# Altium PCB PCB1.pcbdoc
Units mil, origin at the board's own origin, x right, y up, seen from the top; angles counter-clockwise.
Board outline 2191.35 x 1279.37 mil, 4 copper layers (Top Layer, Inner1, Inner2, Bottom Layer), stack 38.584 mil thick; 62 components, 47 nets, 215 pads, 120 vias.
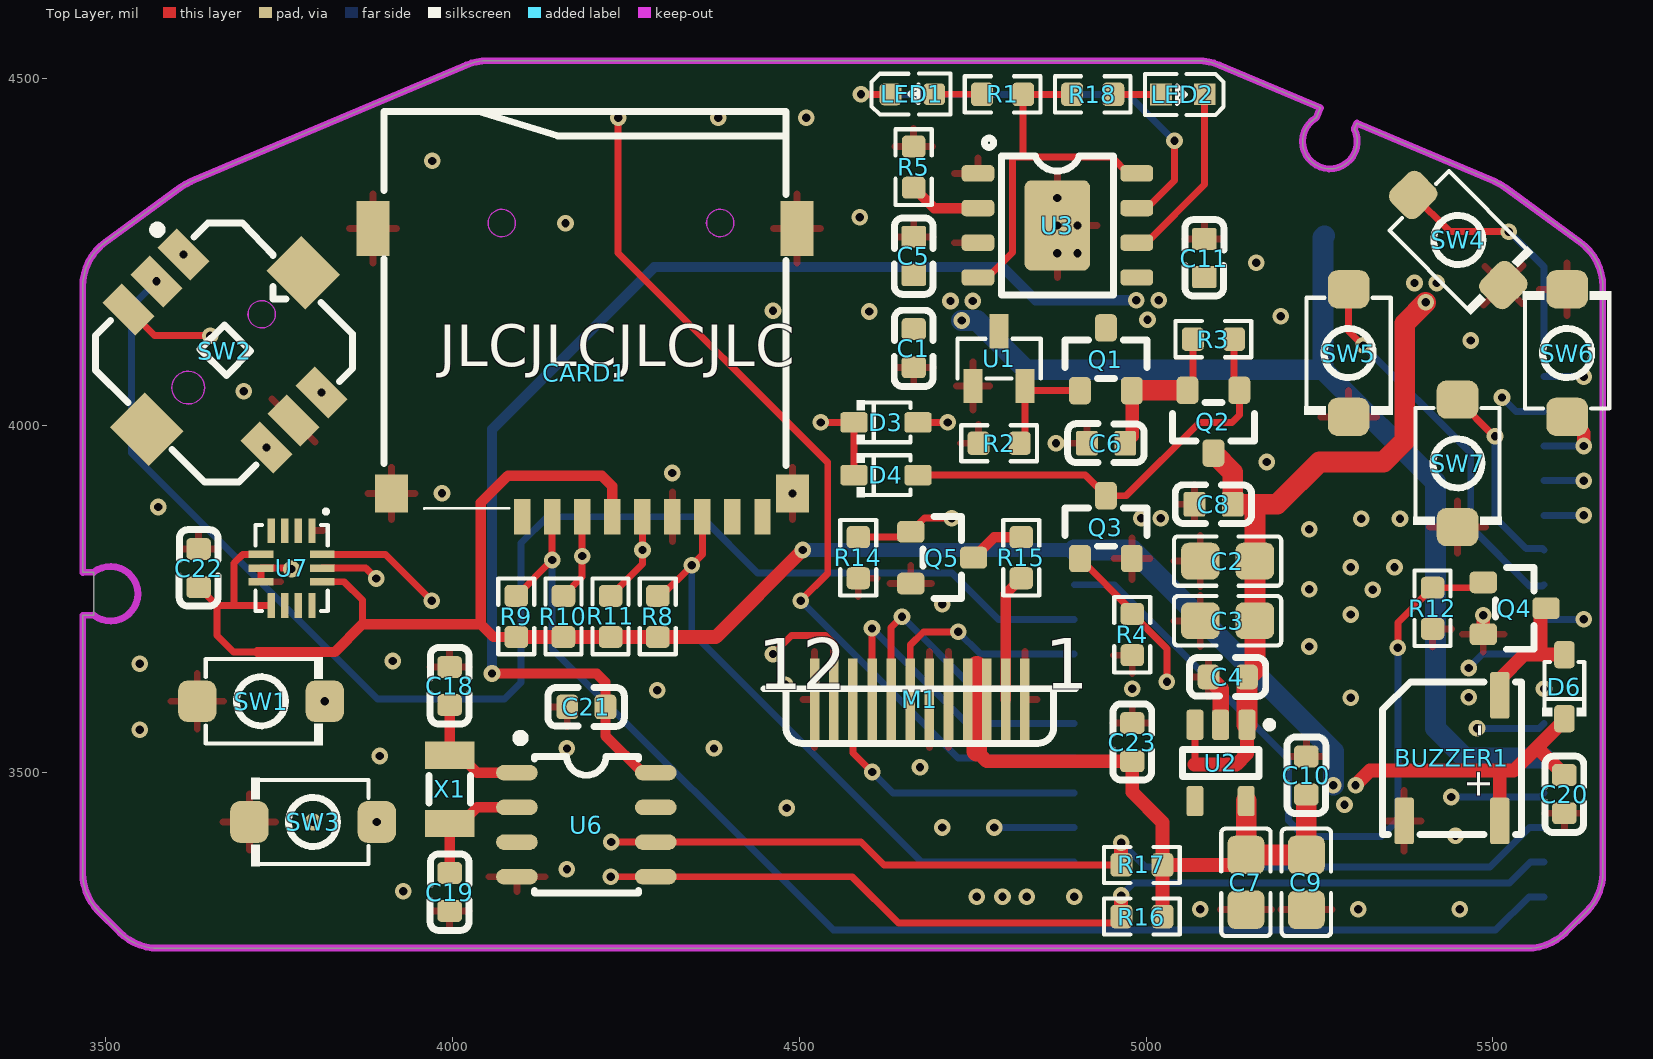
[diagram p0: Top Layer view]
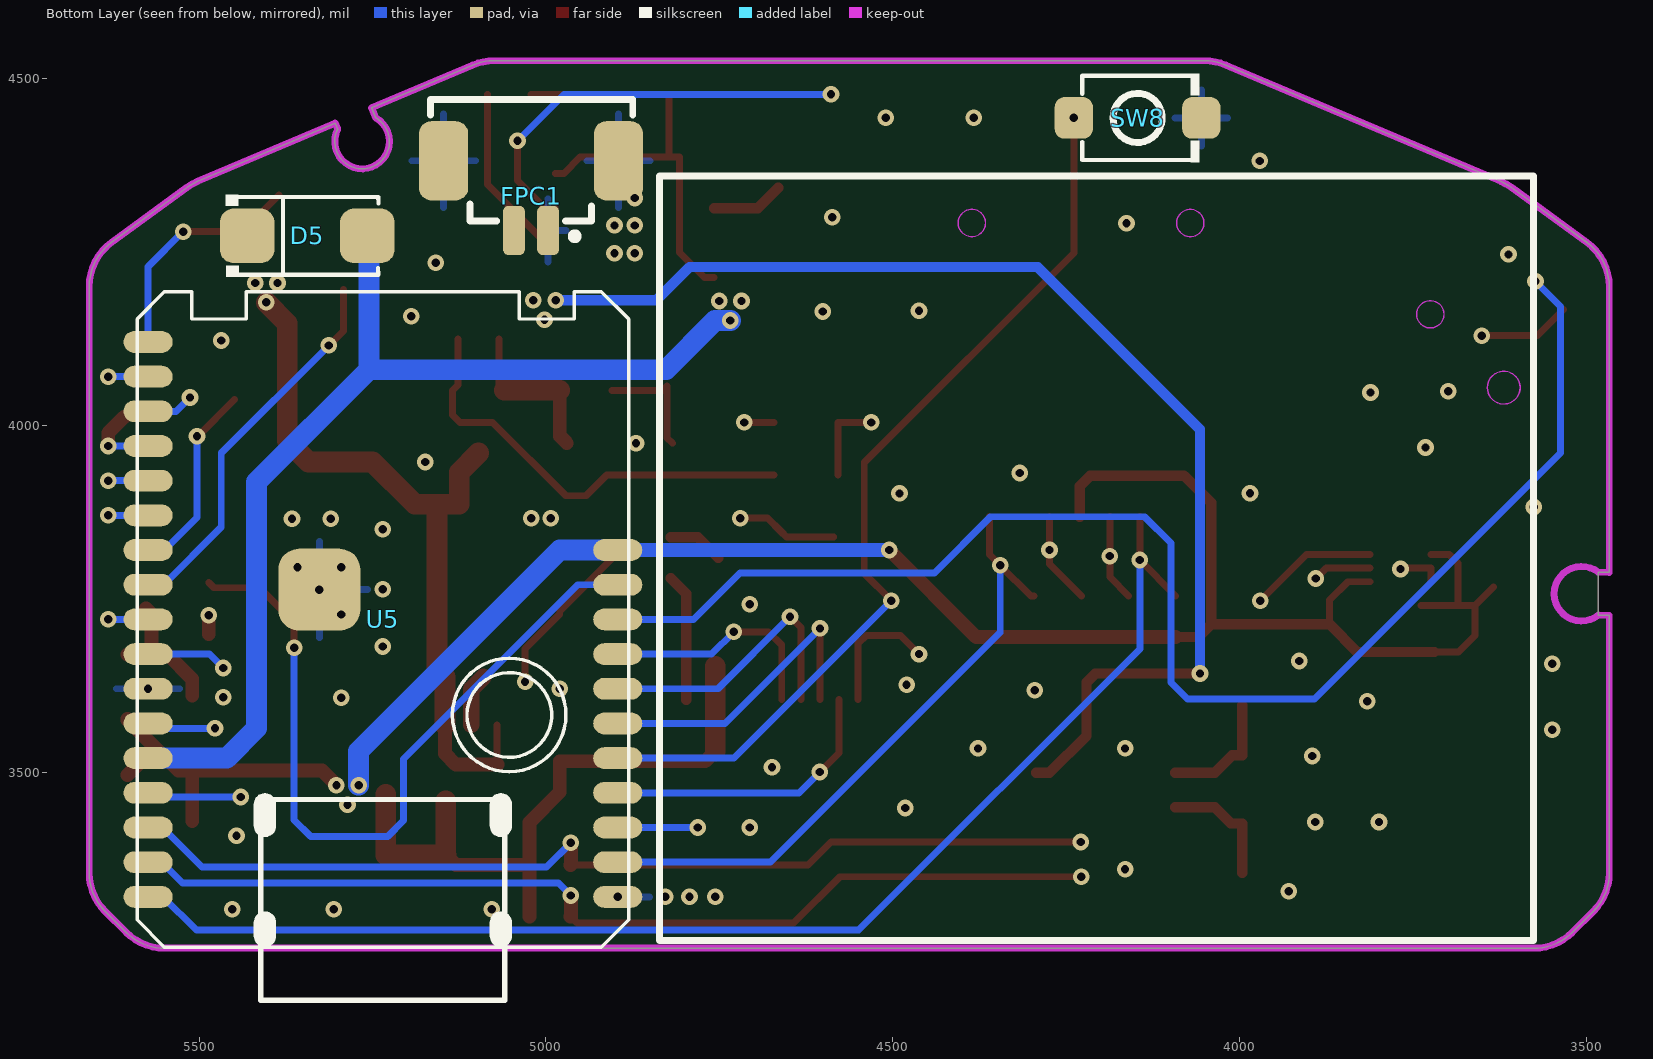
[diagram p1: Bottom Layer view, seen from below]
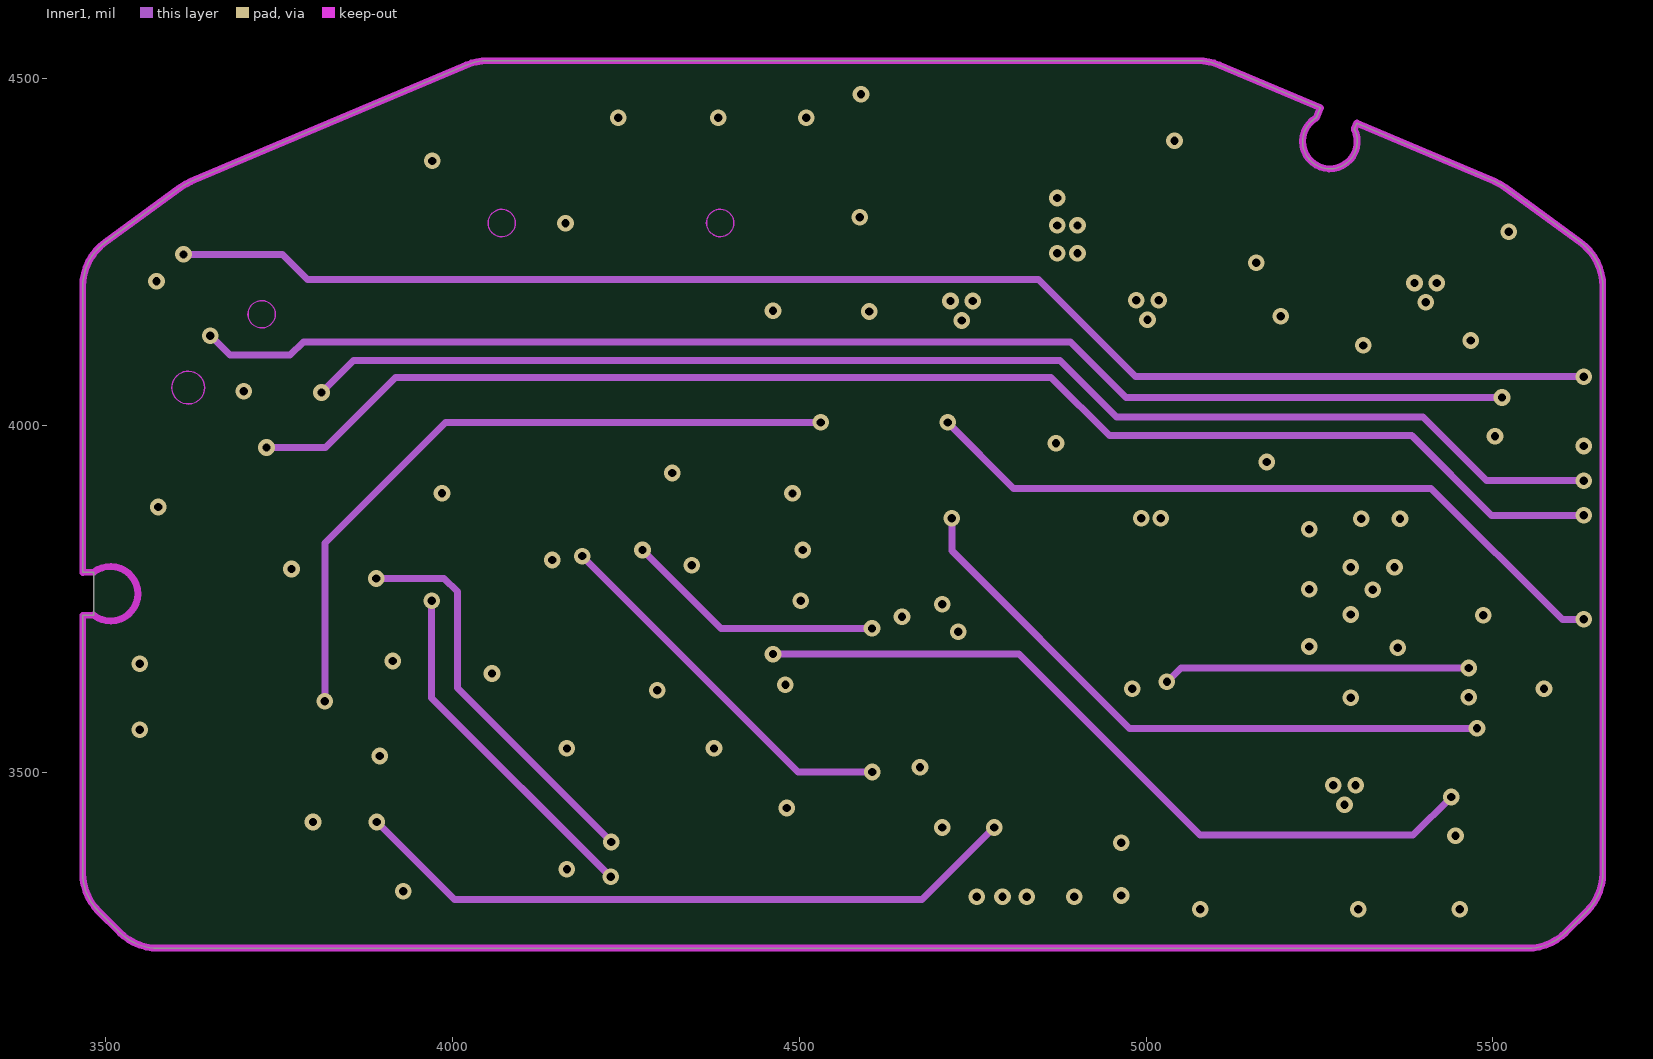
[diagram p2: Inner1]
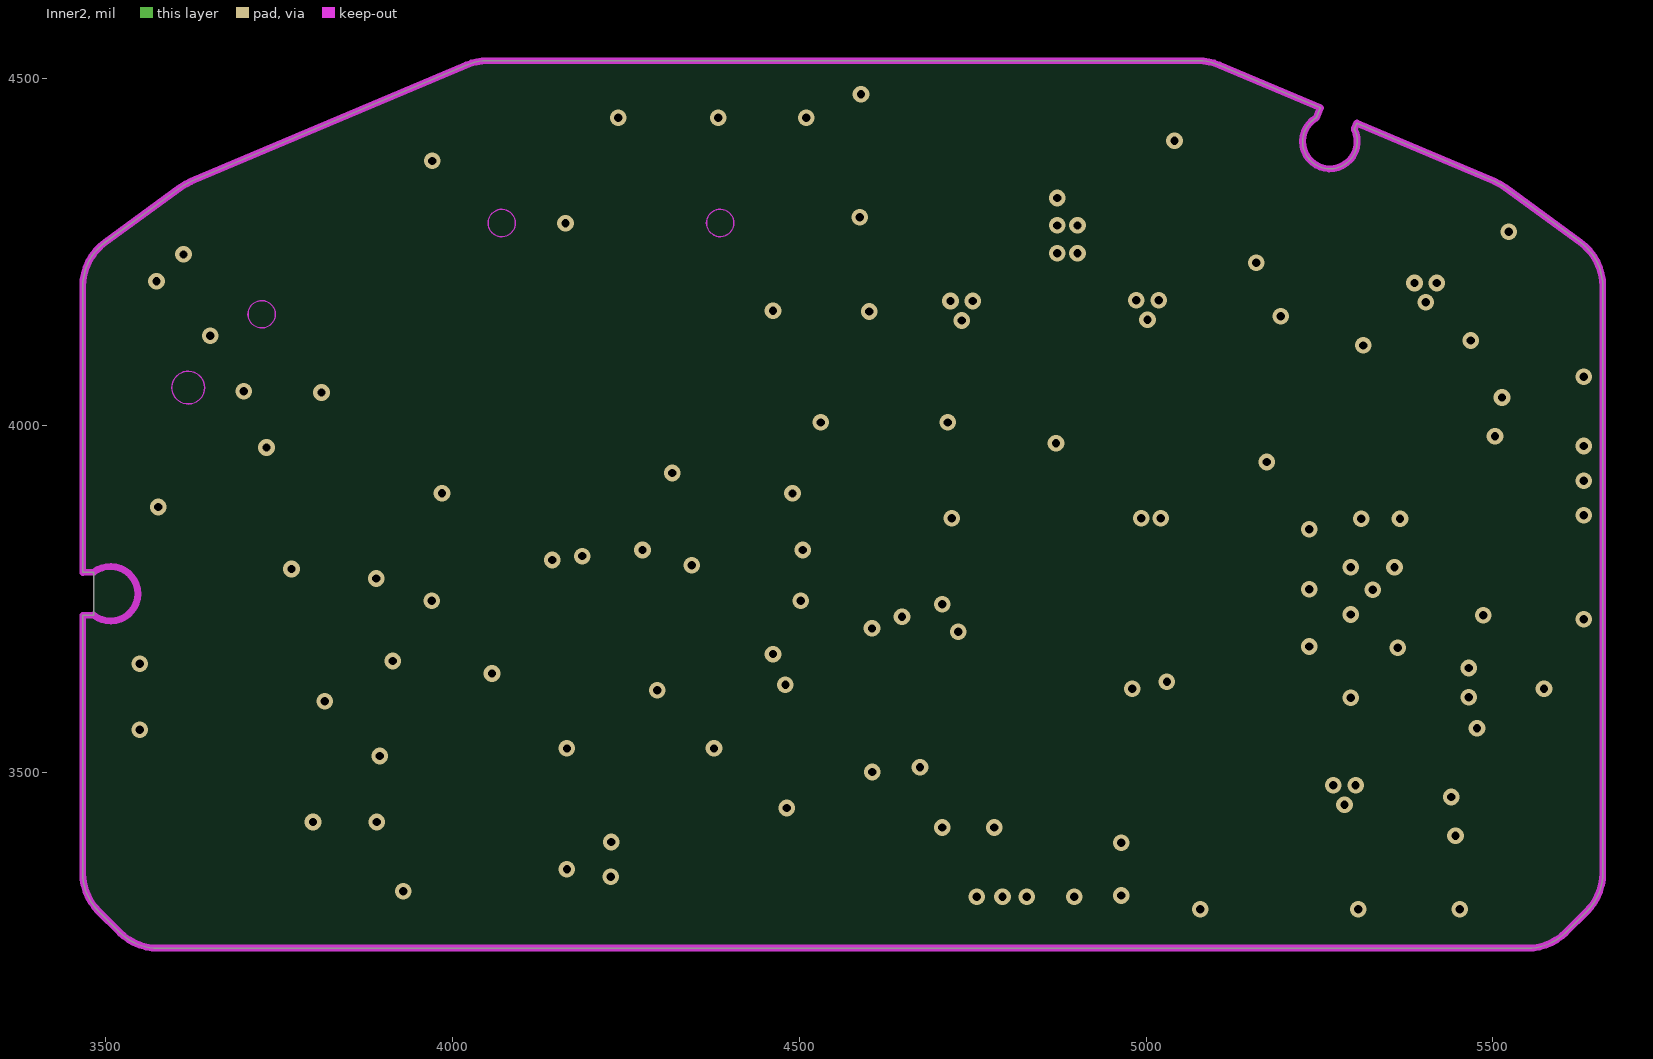
[diagram p3: Inner2]

## Layer stack, top to bottom
Top Solder Mask Layer: solder mask 0.394, Dk 0
Top Layer: signal copper 1.378
Dielectric1: surface 11.024, 7628 RC49% 8.6mil, Dk 0
Inner1: signal copper 1.378
Dielectric2: surface 11.024, 1.1mm H/HOZ 含铜, Dk 0
Inner2: signal copper 1.378
Dielectric3: surface 11.024, 7628 RC49% 8.6mil, Dk 0
Bottom Layer: signal copper 1.378
Bottom Solder Mask Layer: solder mask 0.394, Dk 0

## Board outline
3483,3788 3467,3787.83 3467,4200.07 cw(c3545.74,4200.07) 3499.36,4263.7 3607.66,4342.65 cw(c3654.04,4279.02) 3623.37,4351.54 4019.69,4519.16 cw(c4050.36,4446.63) 4050.36,4525.37 5074.98,4525.37 cw(c5074.98,4446.63) 5105.66,4519.16 5251.31,4457.55 5245,4443 ccw(c5264.96,4409.02) 5300.17,4426.72 5303.82,4435.35 5501.98,4351.54 cw(c5471.31,4279.02) 5517.69,4342.65 5625.99,4263.7 cw(c5579.61,4200.07) 5658.35,4200.07 5658.35,3354.62 cw(c5579.61,3354.62) 5635.29,3298.94 5605.41,3269.06 cw(c5549.73,3324.74) 5549.73,3246 3575.62,3246 cw(c3575.62,3324.74) 3519.94,3269.06 3490.06,3298.94 cw(c3545.74,3354.62) 3467,3354.62 3467,3725.92 3482.73,3726.12

## Design rules (kind name [scope] priority, off if disabled: settings)
BoardOutlineClearance copperThickness1oz [All] p0: genericclearance=10 ignorepadtopadclearanceinfootprint=FALSE except(0: Arc-SplitContinuation Track-SplitContinuation SMDPad-SplitContinuation THPad-SplitContinuation Via-SplitContinuation Fill-SplitContinuation Poly-SplitContinuation Region-SplitContinuation Text-SplitContinuation)
BoardOutlineClearance copperThickness2oz [All] p0: genericclearance=10 ignorepadtopadclearanceinfootprint=FALSE except(0: Arc-SplitContinuation Track-SplitContinuation SMDPad-SplitContinuation THPad-SplitContinuation Via-SplitContinuation Fill-SplitContinuation Poly-SplitContinuation Region-SplitContinuation Text-SplitContinuation)
BoardOutlineClearance Plane_innerPlane [All] p0: genericclearance=10 ignorepadtopadclearanceinfootprint=FALSE except(0: Arc-SplitContinuation Track-SplitContinuation SMDPad-SplitContinuation THPad-SplitContinuation Via-SplitContinuation Fill-SplitContinuation Poly-SplitContinuation Region-SplitContinuation Text-SplitContinuation)
BoardOutlineClearance Copper_copperRegion [All] p0: genericclearance=10 ignorepadtopadclearanceinfootprint=FALSE except(0: Arc-SplitContinuation Track-SplitContinuation SMDPad-SplitContinuation THPad-SplitContinuation Via-SplitContinuation Fill-SplitContinuation Poly-SplitContinuation Region-SplitContinuation Text-SplitContinuation)
BoardOutlineClearance Copper_copperAll [All] p0: genericclearance=10 ignorepadtopadclearanceinfootprint=FALSE except(0: Arc-SplitContinuation Track-SplitContinuation SMDPad-SplitContinuation THPad-SplitContinuation Via-SplitContinuation Fill-SplitContinuation Poly-SplitContinuation Region-SplitContinuation Text-SplitContinuation)
BoardOutlineClearance otherClearance [All] p0: genericclearance=10 ignorepadtopadclearanceinfootprint=FALSE except(0: Arc-SplitContinuation Track-SplitContinuation SMDPad-SplitContinuation THPad-SplitContinuation Via-SplitContinuation Fill-SplitContinuation Poly-SplitContinuation Region-SplitContinuation Text-SplitContinuation)
Clearance copperThickness1oz [All] p1: gap=7 ignorepadtopadclearanceinfootprint=FALSE
Clearance copperThickness2oz [All] p1: gap=7 ignorepadtopadclearanceinfootprint=FALSE
Clearance Plane_innerPlane [All] p1: gap=7 ignorepadtopadclearanceinfootprint=FALSE
Clearance Copper_copperRegion [All] p1: gap=7 ignorepadtopadclearanceinfootprint=FALSE
Clearance Copper_copperAll [All] p1: gap=7 ignorepadtopadclearanceinfootprint=FALSE
Clearance otherClearance [All] p1: gap=7 ignorepadtopadclearanceinfootprint=FALSE
DiffPairsRouting differentialPair [All] p1: maxuncoupledlength=10 minlimit=6 maxlimit=Infinity mostfreqgap=6 toplayer_minwidth=5 toplayer_prefwidth=10 toplayer_maxwidth=100 bottomlayer_minwidth=5 bottomlayer_prefwidth=10 bottomlayer_maxwidth=100 midlayer1_minwidth=5 midlayer1_prefwidth=10 midlayer1_maxwidth=100 midlayer2_minwidth=5 midlayer2_prefwidth=10 midlayer2_maxwidth=100
PasteMaskExpansion pasteMaskExpansion [All] p1: expansion=0
PlaneConnect innerPlane [All] p1: planeconnectstyle=Relief reliefexpansion=20 reliefentries=4 reliefconductorwidth=10 reliefairgap=10
PolygonConnect copperRegion [All] p1: connectstyle=Relief reliefentries=4 reliefconductorwidth=10 polygonreliefangle="90 Angle" airgapwidth=10
PolygonConnect copperAll [All] p1: connectstyle=Direct reliefentries=4 reliefconductorwidth=10 polygonreliefangle="90 Angle" airgapwidth=10
RoutingVias viaSize [All] p1: viastyle="Through Hole" holewidth=12 minholewidth=11.8 maxholewidth=248 width=12 minwidth=11.8 maxwidth=248
SolderMaskExpansion solderMaskExpansion [All] p1: useseparateexpansions=TRUE expansion=2 expansionbottom=2
Width copperThickness1oz [All] p1: maxlimit=100 minlimit=5 preferedwidth=10
Width copperThickness2oz [All] p1: maxlimit=100 minlimit=8 preferedwidth=10

## Components (designator, comment, footprint, x,y, rotation, side; value= is the part's Value field where it differs from the comment)
BUZZER1 "" BUZ-SMD_L5.0-W5.5-P4.60 5441,3520 r90 top
C1 "" C0603#1 4665.05,4111 r90 top
C2 "" C0805 5117.44,3804 r0 top
C3 "" C0805 5117.44,3718 r0 top
C4 "" C0603#1 5117.75,3637 r0 top
C5 "" C0603#2 4665.05,4244 r90 top
C6 "" C0603#2 4942.31,3974 r0 top
C7 "" C0805 5144,3341 r90 top
C8 "" C0603#2 5097.31,3886 r0 top
C9 "" C0805 5231,3341 r90 top
C10 "" C0603#1 5231,3494.97 r270 top
C11 "" C0603#2 5083.89,4241 r270 top
C18 "" C0603#1 3995.79,3624 r270 top
C19 "" C0603#1 3996,3327 r90 top
C20 "" C0603#1 5603,3468.11 r90 top
C21 "" C0603#1 4193,3593.77 r0 top
C22 "" C0603#1 3634,3794 r270 top
C23 "" C0603#1 4980,3543 r270 top
CARD1 "" TF-SMD_TF-01A 4191,4075.88 r180 top
D3 "" SOD-323_L1.8-W1.3-LS2.5-RD#1 4625,4004 r0 top
D4 "" SOD-323_L1.8-W1.3-LS2.5-RD#1 4625,3928 r0 top
D5 "" SMA_L4.3-W2.6-LS5.2-RD 5344,4273 r180 bottom
D6 "" SOD-323_L1.8-W1.3-LS2.5-RD#2 5603,3623 r90 top
FPC1 "" CONN-SMD_2P-P1.25_DEALON_1.25-2PWB 5021.4,4331 r0 bottom locked
LED1 "" LED0603-RD-YELLOW 4663,4477 r0 top
LED2 "" LED0603-RD 5053,4477 r180 top
M1 "" 1.3寸TFT240_240 4043.84,3183.09 r0 top locked
Q1 "" SOT-23_L2.9-W1.3-P1.90-LS2.4-BR 4942,4095 r270 top
Q2 "" SOT-23_L2.9-W1.3-P1.90-LS2.4-BR 5097,4005.01 r90 top
Q3 "" SOT-23-3_L2.9-W1.6-P1.90-LS2.8-BR 4942,3853 r270 top
Q4 "" SOT-23-3_L2.9-W1.6-P1.90-LS2.8-BR 5531.35,3736 r180 top
Q5 "" SOT-23-3_L2.9-W1.6-P1.90-LS2.8-BR 4706,3809 r180 top
R1 "" R0603 4793,4477 r180 top
R2 "" R0603 4788,3974 r0 top
R3 "" R0603 5097,4124 r180 top
R4 "" R0603 4980,3698 r90 top
R5 "" R0603 4664.95,4372 r270 top
R8 "" R0603 4296,3724.26 r270 top
R9 "" R0603 4092,3724.26 r270 top
R10 "" R0603 4160,3724.26 r270 top
R11 "" R0603 4228,3724.26 r270 top
R12 "" R0603 5413,3736 r270 top
R14 "" R0603 4585,3809 r270 top
R15 "" R0603 4820,3809 r270 top
R16 "" R0603 4994,3291.57 r0 top
R17 "" R0603 4994,3366 r0 top
R18 "" R0603 4923,4477 r0 top
SW1 "" SW-SMD_L3.9-W3.0-P4.45 3724,3602 r0 top
SW2 "" SW-SMD_TM-4175-B-X 3672,4107 r315 top locked
SW3 "" SW-SMD_L3.9-W3.0-P4.45 3799,3428 r180 top
SW4 "" SW-SMD_L3.9-W3.0-P4.45 5450,4267 r315 top
SW5 "" SW-SMD_L3.9-W3.0-P4.45 5292,4104 r270 top
SW6 "" SW-SMD_L3.9-W3.0-P4.45 5607,4104 r90 top
SW7 "" SW-SMD_L3.9-W3.0-P4.45 5449,3945 r270 top
SW8 "" SW-SMD_L3.9-W3.0-P4.45 4147,4443 r180 bottom
U1 "" SOT-23-3_L2.9-W1.3-P1.90-LS2.4-BR 4788,4095.98 r270 top
U2 "" SOT-25-5_L3.0-W1.8-P0.95-LS3.0-BR 5107.87,3513 r90 top
U3 "" ESOP-8_L4.9-W3.9-P1.27-LS6.0-BL-EP 4872,4288 r270 top
U5 "" STAMP-S3-PIN-SMD 5235,3720 r180 bottom locked
U6 "" SOIC-8_L5.0-W4.0-P1.27-LS6.0-BL 4193,3424 r270 top
U7 "" LGA-14_L3.0-W2.5-P0.50-BR 3768,3794 r90 top
X1 "" FC-135R_L3.2-W1.5 3996,3475 r270 top

## Footprints (in the part's own frame and the unit in brackets; to place one, negate y for a bottom-side part, rotate by r counter-clockwise, add the part's x,y. Pads: shape width x height; smd on the part's side, far side on the other; paste and mask are expansions set on the pad)
1.3寸TFT240_240 [mm]
  rect 0.35x3 smd: 1(19.85,10.7) 2(19.15,10.7) 3(18.45,10.7) 4(17.75,10.7) 5(17.05,10.7) 6(16.35,10.7) 7(15.65,10.7) 8(14.95,10.7) 9(14.25,10.7) 10(13.55,10.7) 11(12.85,10.7) 12(12.15,10.7)
  silkscreen extent 10.3,9.1 21.7,11.1
BUZ-SMD_L5.0-W5.5-P4.60 [mm]
  rrect20% 1.7x0.7 smd: 1(-2.3,-1.75) 2(2.3,-1.75) 3(-2.3,1.75)
  silkscreen extent -2.79,-2.54 2.79,2.54
C0603#1 [mm]
  rrect40% 0.8x0.9 smd: 1(-0.7,0) 2(0.7,0)
  silkscreen extent -1.41,-0.71 1.39,0.72
C0603#2 [mm]
  rrect20% 0.8x0.9 smd: 1(-0.7,0) 2(0.7,0)
  silkscreen extent -1.41,-0.71 1.39,0.72
C0805 [mm]
  rrect40% 1.41x1.35 smd: 1(-1,0) 2(1,0)
  silkscreen extent -1.96,-0.9 1.96,0.9
CONN-SMD_2P-P1.25_DEALON_1.25-2PWB [mm]
  rrect50% 0.8x1.8 smd: 1(-0.625,1.275) 2(0.625,1.275)
  rrect50% 1.8x2.9 smd: 3(-3.2,-1.275) 4(3.2,-1.275)
  silkscreen extent -3.73,-3.52 3.67,1.62
ESOP-8_L4.9-W3.9-P1.27-LS6.0-BL-EP [mm]
  rrect50% 0.6x1.2 smd: 1(-1.905,-2.908) 2(-0.635,-2.908) 3(0.635,-2.908) 4(1.905,-2.908) 5(1.905,2.908) 6(0.635,2.908) 7(-0.635,2.908) 8(-1.905,2.908)
  rrect20% 3.3x2.4 smd: 9(0,0)
  silkscreen extent -3.2,-2.67 2.55,2.05
FC-135R_L3.2-W1.5 [mm]
  rect 1x1.8 smd: 1(-1.25,0) 2(1.25,0)
  silkscreen extent -0.51,-0.76 0.51,0.76
LED0603-RD [mm]
  rect 0.8x0.8 smd: 1(-0.799,-0.003) 2(0.799,0.003)
  silkscreen extent -1.49,-0.75 1.39,0.76
LED0603-RD-YELLOW [mm]
  rrect40% 0.8x0.8 smd: 1(-0.799,-0.003) 2(0.799,0.003)
  silkscreen extent -1.49,-0.75 1.39,0.76
LGA-14_L3.0-W2.5-P0.50-BR [mm]
  rect 0.9x0.27 smd: 1(1.37,-0.75) 2(1.37,-0.25) 3(1.37,0.25) 4(1.37,0.75) 8(-1.37,0.75) 9(-1.37,0.25) 10(-1.37,-0.25) 11(-1.37,-0.75)
  rect 0.27x0.9 smd: 5(0.5,1.12) 6(0,1.12) 7(-0.5,1.12) 12(-0.5,-1.12) 13(0,-1.12) 14(0.5,-1.12)
  silkscreen extent -1.58,-1.33 2.14,1.33
R0603 [mil]
  rrect40% 31.75x34.02 smd: 1(-29.66,0) 2(29.66,0)
  silkscreen extent -55,-26 55,26
SMA_L4.3-W2.6-LS5.2-RD [mm]
  rrect50% 2x2 smd: 1(-2.2,0) 2(2.2,0)
  silkscreen extent -2.98,-1.5 2.6,1.5
SOD-323_L1.8-W1.3-LS2.5-RD#1 [mm]
  rrect30% 1x0.75 smd: 1(-1.173,0) 2(1.173,0)
  silkscreen extent -1.08,-0.8 0.9,0.8
SOD-323_L1.8-W1.3-LS2.5-RD#2 [mm]
  rrect40% 1x0.75 smd: 1(-1.173,0) 2(1.173,0)
  silkscreen extent -1.08,-0.8 0.9,0.8
SOIC-8_L5.0-W4.0-P1.27-LS6.0-BL [mil]
  oval 22.38x60 smd: 1(-75,-100) 2(-25,-100) 3(25,-100) 4(75,-100) 5(75,100) 6(25,100) 7(-25,100) 8(-75,100)
  silkscreen extent -131,-101 98,75
SOT-23-3_L2.9-W1.3-P1.90-LS2.4-BR [mm]
  rect 1.25x0.7 smd: 1(1,-0.95) 2(1,0.95) 3(-1,0)
  silkscreen extent -0.73,-1.53 0.73,1.53
SOT-23-3_L2.9-W1.6-P1.90-LS2.8-BR [mm]
  rrect40% 1x0.8 smd: 1(1.15,-0.95) 2(1.15,0.95) 3(-1.15,0)
  silkscreen extent -0.7,-1.5 0.7,1.5
SOT-23_L2.9-W1.3-P1.90-LS2.4-BR [mm]
  rrect40% 1x0.8 smd: 1(1.15,-0.95) 2(1.15,0.95) 3(-1.15,0)
  silkscreen extent -0.7,-1.5 0.7,1.5
SOT-25-5_L3.0-W1.8-P0.95-LS3.0-BR [mil]
  rrect30% 43.5x24.5 smd: 1(55,-37.5) 2(55,0.5) 3(55,37.5) 4(-55,37.5) 5(-55,-36.5)
  silkscreen extent -20,-75 60,56
STAMP-S3-PIN-SMD [mm]
  oval 1.8x0.8 smd: 1(-8.6,10.16) 2(-8.6,8.89) 3(-8.6,7.62) 4(-8.6,6.35) 5(-8.6,5.08) 6(-8.6,3.81) 7(-8.6,2.54) 8(-8.6,1.27) 9(-8.6,0) 10(-8.6,-1.27) 11(-8.6,-2.54) 12(-8.6,-3.81) 13(-8.6,-5.08) 14(-8.6,-6.35) 15(-8.6,-7.62) 16(-8.6,-8.89) 17(-8.6,-10.16) 18(8.6,-10.16) 19(8.6,-8.89) 20(8.6,-7.62) 21(8.6,-6.35) 22(8.6,-5.08) 23(8.6,-3.81) 24(8.6,-2.54) 25(8.6,-1.27) 26(8.6,0) 27(8.6,1.27) 28(8.6,2.54)
  rrect50% 3x3 smd: 31(-2.328,1.088)
  silkscreen extent -9,-13.95 9,12
SW-SMD_L3.9-W3.0-P4.45 [mil]
  rrect50% 55x60 smd: 1(-91.93,0) 2(91.93,0)
  silkscreen extent -80,-64 89,64
SW-SMD_TM-4175-B-X [mm]
  rect 1.7x1 smd: 1(-3.575,1.425) 2(-3.575,0.028) 3(-3.575,-1.425) 4(3.575,1.425) 5(3.575,-0.028) 6(3.575,-1.425)
  rect 2x1.8 smd: 7(0,4.05) 7(0,-4.05)
  Board Outline Layer circle w0.003: c0,1.9 r0.5
  Board Outline Layer circle w0.003: c0,-1.9 r0.6
  Board Outline Layer region: 0.354,2.254 0.472,2.065 0.497,1.844 0.423,1.634 0.266,1.477 0.056,1.403 -0.165,1.428 -0.354,1.546 -0.354,1.546 -0.472,1.735 -0.497,1.956 -0.423,2.166 -0.266,2.323 -0.056,2.397 0.165,2.372 0.354,2.254
  Board Outline Layer region: 0.354,2.254 0.472,2.065 0.497,1.844 0.423,1.634 0.266,1.477 0.056,1.403 -0.165,1.428 -0.354,1.546 -0.354,1.546 -0.472,1.735 -0.497,1.956 -0.423,2.166 -0.266,2.323 -0.056,2.397 0.165,2.372 0.354,2.254
  Board Outline Layer region: 0.424,-1.476 0.566,-1.702 0.596,-1.967 0.508,-2.219 0.319,-2.408 0.067,-2.496 -0.198,-2.466 -0.424,-2.324 -0.424,-2.324 -0.566,-2.098 -0.596,-1.833 -0.508,-1.581 -0.319,-1.392 -0.067,-1.304 0.198,-1.334 0.424,-1.476
  Board Outline Layer region: 0.424,-1.476 0.566,-1.702 0.596,-1.967 0.508,-2.219 0.319,-2.408 0.067,-2.496 -0.198,-2.466 -0.424,-2.324 -0.424,-2.324 -0.566,-2.098 -0.596,-1.833 -0.508,-1.581 -0.319,-1.392 -0.067,-1.304 0.198,-1.334 0.424,-1.476
  silkscreen extent -5.04,-3.93 3.76,3.76
TF-SMD_TF-01A [mm]
  rect 0.6x1.3 smd: 1(2.301,5.276) 2(1.201,5.276) 3(0.101,5.276) 4(-0.999,5.276) 5(-2.099,5.276) 6(-3.199,5.276) 7(-4.299,5.276) 8(-5.399,5.276) 9(-6.499,5.276)
  rect 1.2x1.4 smd: 10(-7.599,4.426) 13(7.081,4.426)
  rect 1.2x2 smd: 11(-7.76,-5.276) 12(7.76,-5.276)
  Board Outline Layer circle w0.003: c-4.95,-5.478 r0.5
  Board Outline Layer circle w0.003: c3.05,-5.475 r0.5
  Board Outline Layer region: -5.45,-5.478 -5.4,-5.261 -5.262,-5.087 -5.061,-4.991 -4.839,-4.991 -4.638,-5.087 -4.5,-5.261 -4.45,-5.478 -4.45,-5.478 -4.5,-5.695 -4.638,-5.869 -4.839,-5.965 -5.061,-5.965 -5.262,-5.869 -5.4,-5.695 -5.45,-5.478
  Board Outline Layer region: -5.45,-5.478 -5.4,-5.261 -5.262,-5.087 -5.061,-4.991 -4.839,-4.991 -4.638,-5.087 -4.5,-5.261 -4.45,-5.478 -4.45,-5.478 -4.5,-5.695 -4.638,-5.869 -4.839,-5.965 -5.061,-5.965 -5.262,-5.869 -5.4,-5.695 -5.45,-5.478
  Board Outline Layer region: 2.55,-5.475 2.6,-5.258 2.738,-5.085 2.939,-4.988 3.161,-4.988 3.362,-5.085 3.5,-5.258 3.55,-5.475 3.55,-5.475 3.5,-5.692 3.362,-5.866 3.161,-5.963 2.939,-5.963 2.738,-5.866 2.6,-5.692 2.55,-5.475
  Board Outline Layer region: 2.55,-5.475 2.6,-5.258 2.738,-5.085 2.939,-4.988 3.161,-4.988 3.362,-5.085 3.5,-5.258 3.55,-5.475 3.55,-5.475 3.5,-5.692 3.362,-5.866 3.161,-5.963 2.939,-5.963 2.738,-5.866 2.6,-5.692 2.55,-5.475
  silkscreen extent -7.37,-9.56 7.37,4.97

## Via types
v1: diameter 24, hole 12, Top Layer to Bottom Layer, 108 vias
v2: diameter 24.02, hole 12.01, Top Layer to Bottom Layer, 12 vias

## Nets (pads, with @x,y where several pads share a name; then routed paths per layer and width w, separated by ;. In a path a pad name is that pad's centre, name@x,y a point inside that pad or via, vN(x,y) a via of type N, cw(c..) or ccw(c..) an arc to the next point about the centre after c; other vN are vias at no path point)
$1N2328: R5.2 U3.2 | length 104.7
  Top Layer w15: R5.2 4694.29,4313 U3.2
$1N2338: Q1.1 R2.2 U1.2 | length 167.9
  Top Layer w10: R2.2 4825.4,3981.74 U1.2 4832.29,4049.72 Q1.1
$1N2343: C6.2 Q1.2 Q2.2 R3.2 | length 237.8
  Top Layer w10: Q1.2 Q1.2@4979.96,4050.28 ; Q2.2 5067.34,4058.03 R3.2
  Top Layer w20: C6.2 4979.96,3984.1 Q1.2@4979.96,4050.28
  Top Layer w30: Q1.2@4979.96,4050.28 Q2.2
$1N2351: D4.2 Q2.1 Q3.3 R3.1 | length 636.5
  Top Layer w10: D4.2 4912.28,3928 Q3.3 4971.28,3898.28 5077,4004 5124,4004 5134.4,4014.4 Q2.1 5126.66,4058.03 R3.1
$1N2352: D3.1 D4.1 SW1.2 | length 1138.9
  Top Layer w10: v1(4531,4004) D3.1 D4.1
  Inner1 w10: v1(3815.93,3602) 3815.93,3829.93 3990,4004 v1(4531,4004)
$1N2361: LED1.2 R1.2 | length 68.9
  Top Layer w10: LED1.2 4763.2,4477.14 R1.2
$1N5094: BUZZER1.2 D6.2 Q4.3 | length 201.3
  Top Layer w20: BUZZER1.2 5509.9,3633.89 5545.16,3669.16 5568.51,3669.16 ; Q4.3 5568.51,3727.88 5568.51,3669.16 ; D6.2 5568.51,3669.16
$1N6154: C19.2 U6.2 X1.2 | length 177.8
  Top Layer w15: C19.2 X1.2 4012.78,3425.78 4036,3449 U6.2
$1N6155: C18.2 U6.1 X1.1 | length 179.8
  Top Layer w15: C18.2 3995.99,3596.23 X1.1 4010.78,3524.22 4036,3499 U6.1
$1N15050: LED1.1 U3.7 | length 650.4
  Top Layer w10: v1(4589,4477) 4631.39,4477 LED1.1 ; U3.7 5001,4313 5041,4353 v1(5041,4410)
  Bottom Layer w10: v1(4589,4477) 4974,4477 v1(5041,4410)
$1N15134: LED2.2 R18.2 | length 68.9
  Top Layer w10: R18.2 5021.39,4477 LED2.2
$1N15243: LED2.1 U3.6 | length 263
  Top Layer w10: U3.6 5000.64,4263 5084.48,4346.83 LED2.1
$1N15373: Q5.3 R15.1 | length 81
  Top Layer w15: Q5.3 4780.94,3838.66 R15.1
BUS_I2C_CLK: R17.1 U5.15 U6.6 U7.13 | length 2090.8
  Top Layer w10: U7.13 3875.01,3793.99 v1(3890,3779) ; v1(4229,3399) U6.6 4589,3399 4622,3366 R17.1
  Top Layer w20: v1(4964,3398) 4964,3366.34 R17.1
  Inner1 w10: v1(3890,3779) 3988,3779 4007,3760 4007,3621 v1(4229,3399)
  Bottom Layer w10: v1(4964,3398) 4999,3363 5496,3363 5553,3420 U5.15
BUS_I2C_SDA: R16.1 U5.16 U6.5 U7.14 | length 2118.5
  Top Layer w10: U7.14 3903.32,3813.68 v1(3970,3747) ; v1(4228,3349) U6.5 4576,3349 4643,3282 4954.77,3282 R16.1
  Top Layer w20: v1(4964,3322) 4964,3291.91 R16.1
  Inner1 w10: v1(3970,3747) 3970,3607 v1(4228,3349)
  Bottom Layer w10: v1(4964,3322) 4982,3340 5524,3340 5554,3370 U5.16
BUS_SPI_CLK: CARD1.5 M1.9 R11.1 U5.23 | length 962.1
  Top Layer w10: R11.1 4274,3799.92 v1(4274,3820) 4274,3867.82 CARD1.5 ; M1.9 v1(4604.87,3707)
  Inner1 w10: v1(4274,3820) 4387,3707 v1(4604.87,3707)
  Bottom Layer w10: v1(4604.87,3707) 4741.87,3570 U5.23
BUS_SPI_CS_LCD: M1.8 U5.24 | length 417.6
  Top Layer w10: M1.8 4632.43,3708.43 v1(4648,3724)
  Bottom Layer w10: v1(4648,3724) 4752,3620 U5.24
BUS_SPI_CS_SD: CARD1.2 R9.1 U5.17 | length 1881.7
  Top Layer w10: R9.1 v1(4143.73,3805.65) CARD1.2
  Bottom Layer w10: v1(4143.73,3805.65) 4143.73,3677.27 4549,3272 5504,3272 5552,3320 U5.17
BUS_SPI_MISO: CARD1.7 R8.1 U5.19 | length 929.3
  Top Layer w10: R8.1 4300.92,3753.92 v1(4345,3798) 4360.27,3813.27 CARD1.7
  Bottom Layer w10: v1(4345,3798) 4345,3701 4676,3370 U5.19
BUS_SPI_MOSI: CARD1.3 M1.10 R10.1 U5.21 | length 1092
  Top Layer w10: R10.1 4187.04,3780.96 v1(4187.04,3811.29) CARD1.3 ; M1.10 4577.31,3527.69 v1(4605,3500)
  Inner1 w10: v1(4187.04,3811.29) 4498.33,3500 v1(4605,3500)
  Bottom Layer w10: v1(4605,3500) 4635,3470 U5.21
ESP_EN: SW8.1 U5.22 | length 1325.7
  Top Layer w10: v1(4238.93,4443) 4238.93,4248.07 4541,3946 4541,3786 v1(4502,3747)
  Bottom Layer w10: v1(4502,3747) 4729,3520 U5.22
GND: BUZZER1.3 C1.1 C2.1 C3.1 C4.1 C5.2 C6.1 C7.1 C8.1 C9.1 C10.1 C11.1 C18.1 C19.1 C20.1 C21.1 C22.1 C23.1 CARD1.6 CARD1.10 CARD1.11 CARD1.12 CARD1.13 FPC1.1 FPC1.3 FPC1.4 M1.1 M1.5 M1.6 M1.12 Q3.2 Q4.2 Q5.2 R2.1 R4.1 R5.1 R12.2 R14.2 SW1.1 SW2.5 SW3.2 SW4.2 SW5.2 SW6.2 SW7.2 SW8.2 U1.1 U2.2 U3.1 U3.3 U3.9 U5.11 U5.18 U5.31 U6.4 U7.1 U7.6 U7.7 | length 167.9
  Top Layer w10: U7.7 U7.6 3766.67,3793.99 v1(3768,3792.67)
  Top Layer w20: v1(5486,3726) 5486.07,3725.93 Q4.2
  Top Layer w24: C4.1 5107.37,3619.82 U2.2
  other v1: 5078,3302 5306,3302 5452,3302 4756,3320 4793,3320 4828,3320 4896.42,3320 3929,3328 4165,3360 5446,3408 4706,3420 3799,3428 4482,3448 4674,3507 3895,3523 4165,3534 4377,3534 3549,3561 5295,3607 5465,3608 4295,3618 4980,3620 5573.58,3620 4480,3626 3549,3656 3914,3660 5235,3680.99 5295,3727 4706,3742 5235,3763.46 5326.66,3762.84 5295,3795 5358,3795 5235,3849.85 5310,3865 5366,3865 4993,3866 5021,3866 3576,3882 3985,3902 4490.19,3901.64 4317,3931 5174,3947 4870,3974 3699,4049 5468,4122 5194,4157 4601,4164 4462,4165 5159,4234 4872,4248 4901,4248 4872,4288 4901,4288 4163,4291 4587,4300 4872,4327.55 3971,4381 4383,4443 4510,4443
GPIO0: SW3.1 U5.20 | length 1095
  Inner1 w10: v1(3890.93,3428) 4002.93,3316 4677,3316 v1(4781,3420)
  Bottom Layer w10: v1(4781,3420) U5.20
GPIO1: SW4.1 U5.1 | length 339.9
  Top Layer w10: SW4.1 5438,4279 v1(5523,4279)
  Bottom Layer w10: v1(5523,4279) 5573.58,4228.42 U5.1
GPIO2: SW2.1 U5.2 | length 2149.3
  Inner1 w10: v1(3612.14,4246.2) 3754.8,4246.2 3791,4210 4845,4210 4985,4070 v1(5631,4070)
  Bottom Layer w10: U5.2 v1(5631,4070)
GPIO3: SW2.3 U5.3 | length 2117.3
  Top Layer w10: SW2.3 3570.66,4129 v1(3651,4129)
  Inner1 w10: v1(3651,4129) 3679,4101 3766,4101 3785,4120 4891,4120 4971,4040 v1(5513,4040)
  Bottom Layer w10: v1(5513,4040) 5533,4020 U5.3
GPIO4: SW6.1 U5.4 | length 110
  Top Layer w20: SW6.1 5607.93,4012.07 5631,3989 v1(5631,3970)
  Bottom Layer w10: U5.4 v1(5631,3970)
GPIO5: SW2.4 U5.5 | length 1967.9
  Inner1 w10: v1(3811.2,4047.14) 3857.05,4093 4876,4093 4957,4012 5399,4012 5491,3920 v1(5631,3920)
  Bottom Layer w10: U5.5 v1(5631,3920)
GPIO6: SW2.6 U5.6 | length 2080.9
  Inner1 w10: v1(3731.86,3967.8) 3816.8,3967.8 3918,4069 4863,4069 4947,3985 5383,3985 5498,3870 v1(5631,3870)
  Bottom Layer w10: U5.6 v1(5631,3870)
GPIO7: SW7.1 U5.7 | length 283
  Top Layer w10: SW7.1 5501.93,3984 v1(5503,3984)
  Bottom Layer w10: v1(5503,3984) 5503,3867 5548,3822 5571.58,3822 U5.7
GPIO8: SW5.1 U5.8 | length 557.4
  Top Layer w10: SW5.1 5292,4136 v1(5313,4115)
  Bottom Layer w10: v1(5313,4115) 5468,3960 5468,3853 5553,3768 5571.58,3768 U5.8
GPIO9: D3.2 U5.9 | length 1134.9
  Top Layer w10: D3.2 v1(4714,4004)
  Inner1 w10: v1(4714,4004) 4809,3909 5411,3909 5600,3720 v1(5631,3720)
  Bottom Layer w10: U5.9 v1(5631,3720)
GPIO10: Q3.1 R4.2 U5.10 | length 789.8
  Top Layer w10: Q3.1 4980,3732.32 R4.2 5030,3677.66 v1(5030,3630)
  Inner1 w10: v1(5030,3630) 5050,3650 v1(5465,3650)
  Bottom Layer w10: v1(5465,3650) 5485,3670 U5.10
GPIO11: Q5.1 R14.1 U5.12 | length 1155.8
  Top Layer w10: R14.1 4652.98,3838.66 Q5.1 4680.32,3866 v1(4720,3866)
  Inner1 w10: v1(4720,3866) 4720,3819 4976,3563 v1(5477,3563)
  Bottom Layer w10: v1(5477,3563) 5566.58,3563 U5.12
GPIO12: M1.11 U5.14 | length 1429.9
  Top Layer w10: v1(4462,3670) 4489,3697 4538,3697 4550,3685 4550,3604.6 M1.11
  Inner1 w10: v1(4462,3670) 4817,3670 5078,3409 5385,3409 v1(5440,3464)
  Bottom Layer w10: v1(5440,3464) 5567.58,3464 U5.14
GPIO42: M1.7 U5.25 | length 336.2
  Top Layer w10: M1.7 4659.99,3682.99 4679,3702 v1(4729,3702)
  Bottom Layer w10: v1(4729,3702) 4761,3670 U5.25
GPIO46: Q4.1 R12.1 U5.27 | length 1110.7
  Top Layer w10: v1(5363,3679) 5363,3715.66 R12.1 5478.33,3765.66 Q4.1
  Bottom Layer w10: U5.27 4954,3770 5205,3519 5205,3430 5228,3407 5339,3407 5363,3431 v1(5363,3679)
IMU_INT1: U7.4
IMU_INT2: U7.9
KEY_JS_BUTTON: SW2.2 U5.26 | length 2056.8
  Bottom Layer w10: v1(3573.25,4207.3) 3537,4171.05 3537,3960 3892,3605 4075,3605 4099,3629 4099,3830 4137,3868 4359,3868 4440,3787 4720,3787 4787,3720 U5.26
LCD_LEDK: M1.2 R15.2 | length 184.2
  Top Layer w15: M1.2 4797.79,3757.13 R15.2
RTC_INT: U6.3
SD_DET: CARD1.9
VBAT: C2.2 C3.2 C4.2 C8.2 D5.1 Q2.3 U2.1 U2.3 | length 1085.9
  Top Layer w10: 5069.74,3511 5070.37,3511.62 U2.3
  Top Layer w20: 5069.74,3511 5130,3511 5145.37,3526.37 U2.1
  Top Layer w30: Q2.3 5124.86,3931.86 C8.2 5188.76,3886 5249.76,3947 5342.24,3947 5373,3977.76 5373,4147 v2(5403,4177) ; C4.2 5156.81,3648.51 C3.2 C2.2 5156.81,3885.27 ; U2.1 C4.2@5145.37,3636.94
  other v2: 5387,4205 5419,4205
VBAT_IN: C11.2 C21.2 FPC1.2 Q1.3 U3.5 U6.8 | length 1738.1
  Top Layer w15: v1(4057,3642) 4208,3642 4220.56,3629.44 C21.2 4220.56,3552.44 4274,3499 U6.8
  Bottom Layer w15: v1(4057,3642) 4057,3994 4291,4228 4793,4228 4841,4180 v2(4986,4180)
  other v2: 5002,4152 5018,4180
VBUS: C1.2 C5.1 D5.2 R1.1 R18.1 U1.3 U3.4 U3.8 U5.13 | length 2055.5
  Top Layer w10: U3.4 4771.64,4213 4807.34,4248.7 4807.34,4386.35 4822.29,4386.35 ; R18.1 R1.1 4822.66,4386.72 4822.29,4386.35 ; U3.8 4974,4363 4950.65,4386.35 4822.29,4386.35
  Bottom Layer w30: v2(4734,4151) 4756,4151 4827,4080 5255,4080 ; D5.2 5255,4270.61 5255,4080 ; U5.13 5460,3520 5417,3563 5417,3918 5255,4080
  other v2: 4718,4179 4750,4179
VDD3V3: BUZZER1.1 C7.2 C9.2 C10.2 C20.2 C22.2 C23.2 CARD1.4 D6.1 M1.3 M1.4 R8.2 R9.2 R10.2 R11.2 R16.2 R17.2 U2.5 U5.28 U7.5 U7.8 U7.12 | length 4105.1
  Top Layer w10: C22.2 3660.38,3740.07 ; 3685,3740.13 3685,3801 3697.68,3813.68 U7.5 ; 3719,3673 3684.38,3673 3660.38,3697 3660.38,3740.07 ; U7.8 3660.38,3740.07 ; U7.12 3843.7,3774.3 3870,3748 3870,3713
  Top Layer w15: 3719,3673 3830,3673 3870,3713 4041,3713 ; R9.2 4059.4,3694.6 4041,3713 ; CARD1.4 4230.35,3912 4215.35,3927 4080,3927 4041,3888 4041,3713
  Top Layer w20: R9.2 R10.2 R11.2 R8.2 4379.6,3694.6 v1(4505,3820) ; 4755.88,3530.12 4770.56,3515.44 C23.2 4980,3471 5023.66,3427.34 R17.2 ; R16.2 R17.2 ; C7.2 5129.63,3366 R17.2 ; v2(5302,3481) 5323,3502 5509.9,3502 ; BUZZER1.1 5509.9,3502 ; C20.2 5563.45,3535.22 5563.22,3535.22 ; D6.1 5603,3575 5563.22,3535.22 ; 5509.9,3502 5530,3502 5563.22,3535.22
  Top Layer w30: 4755.88,3530.12 4755.88,3652 ; C7.2 C7.2@5144.37,3380.74 ; U2.5 C7.2@5144.37,3380.74 ; C10.2 C9.2 5144.73,3380.37 C7.2@5144.37,3380.74
  Bottom Layer w20: v1(4505,3820) U5.28
  Bottom Layer w30: U5.28 4980,3820 5270,3530 v2(5270,3481)
  other v2: 5286,3453
pads on no net: CARD1.1 CARD1.8 SW2.7 U2.4 U6.7 U7.2 U7.3 U7.10 U7.11

## Polygon pours and split planes (outlines as drawn)
VBAT_IN on Bottom Layer (solid, remove dead copper, pour order 10): 5030,4314.11 5030,4220 5009,4199 4968,4199 4968,4137 5035.6,4137 5093.12,4194.52 5093.12,4314.11
VBAT_IN on Top Layer (solid, remove dead copper, pour order 2): 4965.71,4228.1 4965.71,4194.65 4942,4170.94 4942,4123 4998,4123 5077.88,4202.88 5077.88,4228.1
VBUS on Top Layer (solid, remove dead copper, pour order 4): 4657.05,4221.44 4657.05,4122.35 4797,4122.35 4797,4200.5 4776.06,4221.44
VBUS on Bottom Layer (solid, remove dead copper, pour order 16): 4703,4195 4766,4195 4766,4135 4703,4135
VBAT on Bottom Layer (solid, remove dead copper, pour order 18): 5372,4306 5372,4162 5434,4162 5434,4306
VBAT on Top Layer (solid, remove dead copper, pour order 10): 5372,4162 5434,4162 5434,4221 5372,4221
VDD3V3 on Top Layer (solid, remove dead copper, pour order 12): 5231,3470 5231,3438 5294,3438 5317,3461 5317,3496 5257,3496
VDD3V3 on Bottom Layer (solid, remove dead copper, pour order 24): 5253.59,3499 5253.59,3437 5320,3437 5320,3499
GND on Top Layer (solid, remove dead copper, pour order 16): 3246,4668 5959,4668 5959,3000 3246,3000
GND on Bottom Layer (solid, remove dead copper, pour order 28): 3167,4769 5987,4769 5987,3032 3167,3032
GND on Inner1 (solid, remove dead copper): 3115,4819 6051,4819 6051,3093 3115,3093
GND on Inner2 (solid, remove dead copper): 3000,4956 6139,4956 6139,3146 3000,3146

## Keep-outs
Board Outline Layer:
  the board outline again, w10

## Silkscreen, mask and mechanical layers (free items; w line width, h text height)
Top Silkscreen Layer:
  text "JLCJLCJLCJLC" at 3981,4085 h60
Bottom Silkscreen Layer:
  lines w10: 3576.26,3256.9 3576.26,4359.26 4836.1,4359.26 4836.1,3256.9 3576.26,3256.9
Document Layer:
  circle w10: c3673.31,4109 r236.22
  circle w10: c5449.81,4266.48 r78.74
  circle w10: c5607.29,4103 r78.74
  circle w10: c5292.33,4109 r78.74
  circle w10: c5449.81,3945.52 r78.74
  circle w10: c5386,3508 r159
  lines w10: 3361,4292.39 3361,4310.32 3470.44,4419.77 ; 3361.74,3588.44 3489,3337 3734,3200 4331,3175 ; 4561.56,3266.65 4561.56,4495 ; 4561.56,3495 4561.56,4439.88 ; 5653.56,4419.77 5763,4310.32 5763,4292.39 ; 5762.26,3588.44 5635,3337 5390,3200 4793,3175 ; 4331,3175 4112.99,3119 3553,3119 3361,3311 3361,4382.05 4010.88,4606 4562,4606 5113.12,4606 5763,4382.05 5763,3311 5571,3119 5011.01,3119 4793,3175 ; 4331,3175 4562,3175 4793,3175 ; 3655.22,3531.67 ccw(c3693.3,3569.75) 3731.37,3531.67 3791.8,3592.1 ccw(c3753.72,3630.17) 3791.8,3668.25 ccw(c3753.72,3630.17) 3715.65,3668.25 3655.22,3607.82 ccw(c3693.3,3569.75) 3655.22,3531.67 ; 3728.71,3357.71 ccw(c3766.79,3395.79) 3804.86,3357.71 3865.29,3418.14 ccw(c3827.21,3456.21) 3865.29,3494.29 ccw(c3827.21,3456.21) 3789.14,3494.29 3728.71,3433.86 ccw(c3766.79,3395.79) 3728.71,3357.71 ; 4043.84,3302.09 5079.28,3302.09 5079.28,4459.57 4043.84,4459.57 4043.84,3302.09 ; 4098.84,3480.83 5020.1,3480.83 5020.1,4402.09 4098.84,4402.09 4098.84,3480.83

## Text inside footprints (layer, text, board x,y; h text height)
BUZZER1: Top Silkscreen Layer "+" at 5496,3460 h39.37 r90; Top Silkscreen Layer "-" at 5496,3550 h39.37 r90
M1: Top Silkscreen Layer "1" at 4853.84,3620.03 h72.6; Top Silkscreen Layer "12" at 4440.12,3619.42 h73.73